# EAGLE board 3d model (EAGLE 7.6.0)

Size 73.58 x 63.39 mm. Coordinates in mm from the lower left corner, seen from the top.
Outline: 0,0 56.82,0 56.82,53.33 0,53.33 0,0
Copper layers (1*16): Top 0.035mm / dielectric 1.5mm / Bottom 0.035mm
Design rules "default": minimum track width 10mil, minimum drill 24mil, track to track 8mil, track to pad 8mil, pad to pad 8mil, via to via 8mil, smd to smd 8mil, copper to edge 40mil, drill to drill 8mil, minimum pad ring 10mil, minimum via ring 8mil, stop-mask expansion 4mil, vias tented up to drill 0mil, thermal gap 10mil

## Footprints (pad centres in the part's own frame; a part is rotated, then mirrored left to right if it is on the bottom)
LED5MM = drill 0.813 octagon: A -1.27,0; K 1.27,0
G6A-234P = drill 1.016 long: 1 -3.81,-3.81; 16 -3.81,3.81; O1 8.89,-3.81; O2 8.89,3.81; P1 3.81,-3.81; P2 3.81,3.81; S1 13.97,-3.81; S2 13.97,3.81
1X3P-2.54-2.54-11.6-3.0-BLACK-MALE = drill 0.889 pad 1.651 square: 1 0,2.54 | drill 0.889 pad 1.651: 2 0,0; 3 0,-2.54
0207/10 = drill 0.813 octagon: 1 -5.08,0; 2 5.08,0
PHOTORESISTOR-2.54 = drill 1 pad 1.5: P$1 -1.27,0; P$2 1.27,0
TL1105 = drill 1 pad 1.676: 1 -2.25,3.25; 2 2.25,3.25; 3 -2.25,-3.25; 4 2.25,-3.25
DIP04YL = drill 0.813 long: 1 -3.81,-3.81; 2 -1.27,-3.81; 3 1.27,-3.81; 4 3.81,-3.81; 5 3.81,3.81; 6 1.27,3.81; 7 -1.27,3.81; 8 -3.81,3.81
ARDUINO_UNO = drill 1.016 pad 1.88: 0 63.5,50.8; 1 60.96,50.8; 2 58.42,50.8; 3 55.88,50.8; 3.3V 35.56,2.54; 4 53.34,50.8; 5 50.8,50.8; 5V 38.1,2.54; 6 48.26,50.8; 7 45.72,50.8; 8 41.656,50.8; 9 39.116,50.8; 10 36.576,50.8; 11 34.036,50.8; 12 31.496,50.8; 13 28.956,50.8; A0 50.8,2.54; A1 53.34,2.54; A2 55.88,2.54; A3 58.42,2.54; A4 60.96,2.54; A5 63.5,2.54; AREF 23.876,50.8; GND 26.416,50.8; GND. 43.18,2.54; GND.. 40.64,2.54; I/OREF 30.48,2.54; N/C 27.94,2.54; RESET 33.02,2.54; SCL 18.796,50.8; SDA 21.336,50.8; VIN 45.72,2.54 | hole 3.2: 66.04,7.62; 66.04,35.56; 15.24,50.8; 13.97,2.54
TO92 = drill 0.813 octagon: 1 1.27,0; 2 0,1.905; 3 -1.27,0
DIL16 = drill 0.813 long: 1 -8.89,-3.81; 2 -6.35,-3.81; 3 -3.81,-3.81; 4 -1.27,-3.81; 5 1.27,-3.81; 6 3.81,-3.81; 7 6.35,-3.81; 8 8.89,-3.81; 9 8.89,3.81; 10 6.35,3.81; 11 3.81,3.81; 12 1.27,3.81; 13 -1.27,3.81; 14 -3.81,3.81; 15 -6.35,3.81; 16 -8.89,3.81

## Placement (x,y rotation side)
D1  [LED5MM]  5,73.58 0 top  (outside the outline)
D3  [LED5MM]  5,149.78 0 top  (outside the outline)
D4  [LED5MM]  5,162.48 0 top  (outside the outline)
D5  [LED5MM]  5,175.18 0 top  (outside the outline)
D8  [LED5MM]  5,187.88 0 top  (outside the outline)
D9  [LED5MM]  5,200.58 0 top  (outside the outline)
D10  [LED5MM]  5,213.28 0 top  (outside the outline)
D11  [LED5MM]  5,340.28 0 top  (outside the outline)
K1  [G6A-234P]  5,22.78 0 top
PING1  [1X3P-2.54-2.54-11.6-3.0-BLACK-MALE]  5,35.48 0 top
R1  1k‎Ω  [0207/10]  5,60.88 0 top
R2  10k‎Ω  [0207/10]  5,302.18 0 top  (outside the outline)
R3  1k‎Ω  [0207/10]  5,86.28 0 top  (outside the outline)
R4  [PHOTORESISTOR-2.54]  5,111.68 0 top  (outside the outline)
R5  [PHOTORESISTOR-2.54]  5,124.38 0 top  (outside the outline)
R6  100‎Ω  [0207/10]  5,225.98 0 top  (outside the outline)
R7  100‎Ω  [0207/10]  5,238.68 0 top  (outside the outline)
R8  100‎Ω  [0207/10]  5,251.38 0 top  (outside the outline)
R9  10k‎Ω  [0207/10]  5,289.48 0 top  (outside the outline)
R10  10k‎Ω  [0207/10]  5,314.88 0 top  (outside the outline)
R13  100‎Ω  [0207/10]  5,352.98 0 top  (outside the outline)
S1  [TL1105]  5,48.18 0 top
S2  [TL1105]  5,276.78 0 top  (outside the outline)
SW1  [DIP04YL]  5,264.08 0 top  (outside the outline)
U1  [ARDUINO_UNO]  5,10.08 0 top
U2  [TO92]  5,98.98 0 top  (outside the outline)
U3  [TO92]  5,137.08 0 top  (outside the outline)
U4  [DIL16]  5,365.68 0 top  (outside the outline)
U5  [DIL16]  5,327.58 0 top  (outside the outline)

## Library data of the parts
D1 D3-D5 D8-D11 K1 PING1 R1-R10 R13 S1 S2 SW1 U1-U5 = AUTODESK_CIRCUITS_BREADBOARD

## Nets
N$1: K1.16 U1.2
N$2: PING1.3 U1.3
N$3: S1.2
N$4: S1.1 U1.4
N$5: U1.A1 U2.2
N$6: R1.2 S1.3
N$7: S1.4 S2.4 U1.3.3V
N$8: U1.A2 U3.2
N$9: D3.A D8.A R6.2
N$10: D4.A D9.A R7.2
N$11: D5.A D10.A R8.2
N$12: R6.1 U1.5
N$13: R7.1 U1.6
N$14: R8.1 U1.9
N$15: SW1.8
N$16: SW1.1
N$17: SW1.2
N$18: SW1.7
N$19: D1.K D11.K PING1.1 R1.1 R2.1 R9.1 R10.1 SW1.4 U1.GND. U2.1 U3.1 U4.4 U5.4
N$20: S2.2
N$21: S2.1 U1.7
N$22: R9.2 S2.3
N$23: D1.A R3.1 R3.2 U1.8
N$24: R2.2 R5.P$2 U1.A3
N$25: R4.P$2 R10.2 U1.A0
N$26: U5.2
N$27: U5.3
N$28: U5.5
N$29: U5.6
N$30: U5.7
N$31: U1.1 U5.9
N$32: U1.0 U5.10
N$33: U5.1 U5.11
N$34: U5.14
N$35: U1.11 U5.15
N$36: K1.1 U1.GND..
N$37: K1.P2 PING1.2 U1.5V
N$38: U5.12
N$39: U5.13
N$40: D11.A R13.2
N$41: SW1.6
N$42: SW1.3
N$43: U4.2
N$44: U4.3
N$45: U4.5
N$46: U4.6
N$47: U4.7
N$48: U1.13 U4.9
N$49: U1.12 U4.10
N$50: U4.11
N$51: U4.12
N$52: U4.13
N$53: D3.K D4.K D5.K D8.K D9.K D10.K SW1.5
N$54: U1.10 U4.15
N$55: K1.O2 R4.P$1 R5.P$1 R13.1 U2.3 U3.3 U4.8 U4.16 U5.8 U5.16
N$56: U4.14
N$57: U4.1

## Tracks (layer width: path | path; a pad name or v marks a point on that pad's centre or on a via)
N$1  (1 unrouted)
N$2  (1 unrouted)
N$4  (1 unrouted)
N$5  (1 unrouted)
N$6  (1 unrouted)
N$7  (2 unrouted)
N$8  (1 unrouted)
N$9  (2 unrouted)
N$10  (2 unrouted)
N$11  (2 unrouted)
N$12  (1 unrouted)
N$13  (1 unrouted)
N$14  (1 unrouted)
N$19  (12 unrouted)
N$21  (1 unrouted)
N$22  (1 unrouted)
N$23  (3 unrouted)
N$24  (2 unrouted)
N$25  (2 unrouted)
N$31  (1 unrouted)
N$32  (1 unrouted)
N$33  (1 unrouted)
N$35  (1 unrouted)
N$36  (1 unrouted)
N$37  (2 unrouted)
N$40  (1 unrouted)
N$48  (1 unrouted)
N$49  (1 unrouted)
N$53  (6 unrouted)
N$54  (1 unrouted)
N$55  (9 unrouted)